# EAGLE board climbing (EAGLE 6.3)
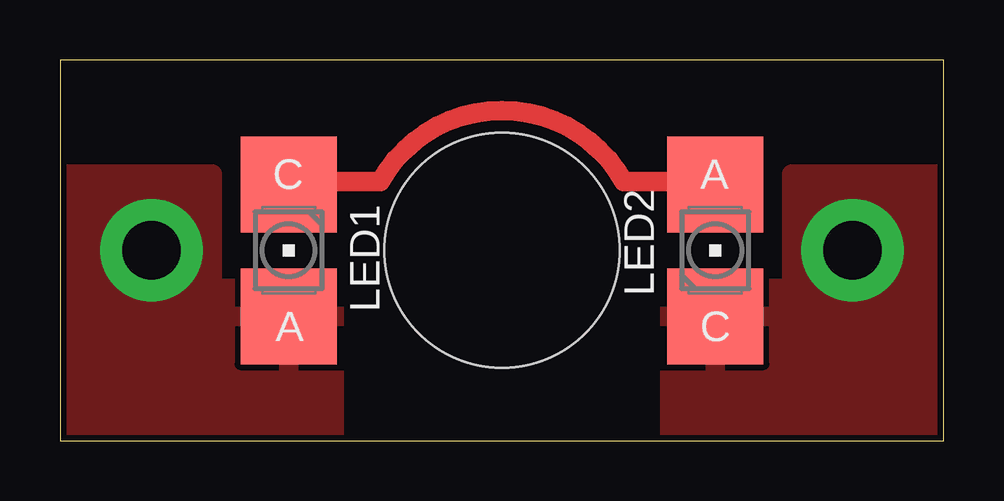
[diagram p0: board, top side]
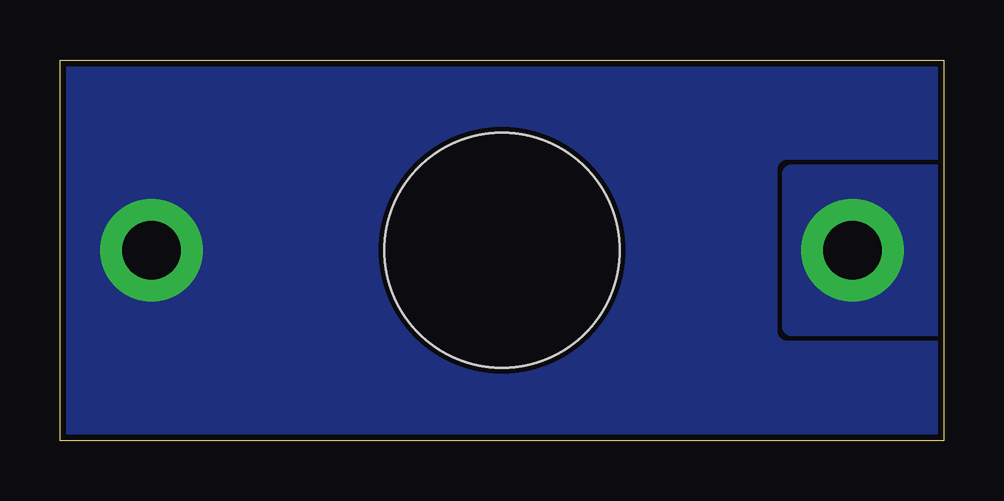
[diagram p1: board, bottom side, seen from below]

Size 36.83 x 15.88 mm. Coordinates in mm from the lower left corner, seen from the top.
Outline: 0,0 36.83,0 36.83,15.88 0,15.88 0,0
Copper layers (1*16): Top 0.035mm / dielectric 1.5mm / Bottom 0.035mm
Design rules "SparkFun *": minimum track width 8mil, minimum drill 20mil, track to track 8mil, track to pad 8mil, pad to pad 8mil, via to via 8mil, smd to smd 8mil, copper to edge 10mil, drill to drill 8mil, minimum pad ring 12mil, minimum via ring 36mil, stop-mask expansion 4mil, vias tented up to drill 25mil, thermal gap 10mil
Holes 9.78 mm at 18.41,7.94

## Footprints (pad centres in the part's own frame; a part is rotated, then mirrored left to right if it is on the bottom)
P-LCC-2 = smd 4 x 4: A 0,2.75; C 0,-2.75

## Placement (x,y rotation side)
LED1  [P-LCC-2]  9.53,7.94 180 top
LED2  [P-LCC-2]  27.3,7.94 0 top

## Library data of the parts
LED1 LED2 = led

## Nets
GND: LED2.C
N$1: LED1.C LED2.A
VCC: LED1.A

## Tracks (layer width: path | path; a pad name or v marks a point on that pad's centre or on a via)
GND  (via drill 2.44)
  other vias: 33.02,7.94
  pour Bottom (rank 6): 0,15.88 36.83,15.88 36.83,0 0,0
  pour Top: 36.83,11.11 30.48,11.11 30.48,6.35 25.4,6.35 25.4,0 36.83,0
N$1
  Top 0.813: LED2.A 27.2,10.79 23.5,10.79 arc121 13.34,10.79 9.63,10.79 LED1.C
VCC  (via drill 2.44)
  other vias: 3.81,7.94
  pour Top: 0,0 11.43,0 11.43,6.35 6.35,6.35 6.35,11.11 0,11.11
  pour Bottom: 0,11.11 6.35,11.11 6.35,4.76 0,4.76